# Altium PCB Game_ConsolASCII.PcbDoc
Units mil, origin at the board's own origin, x right, y up, seen from the top; angles counter-clockwise.
Board outline 3090.55 x 1732.28 mil, 2 copper layers (Top Layer, Bottom Layer); 56 components, 44 nets, 222 pads, 75 vias.
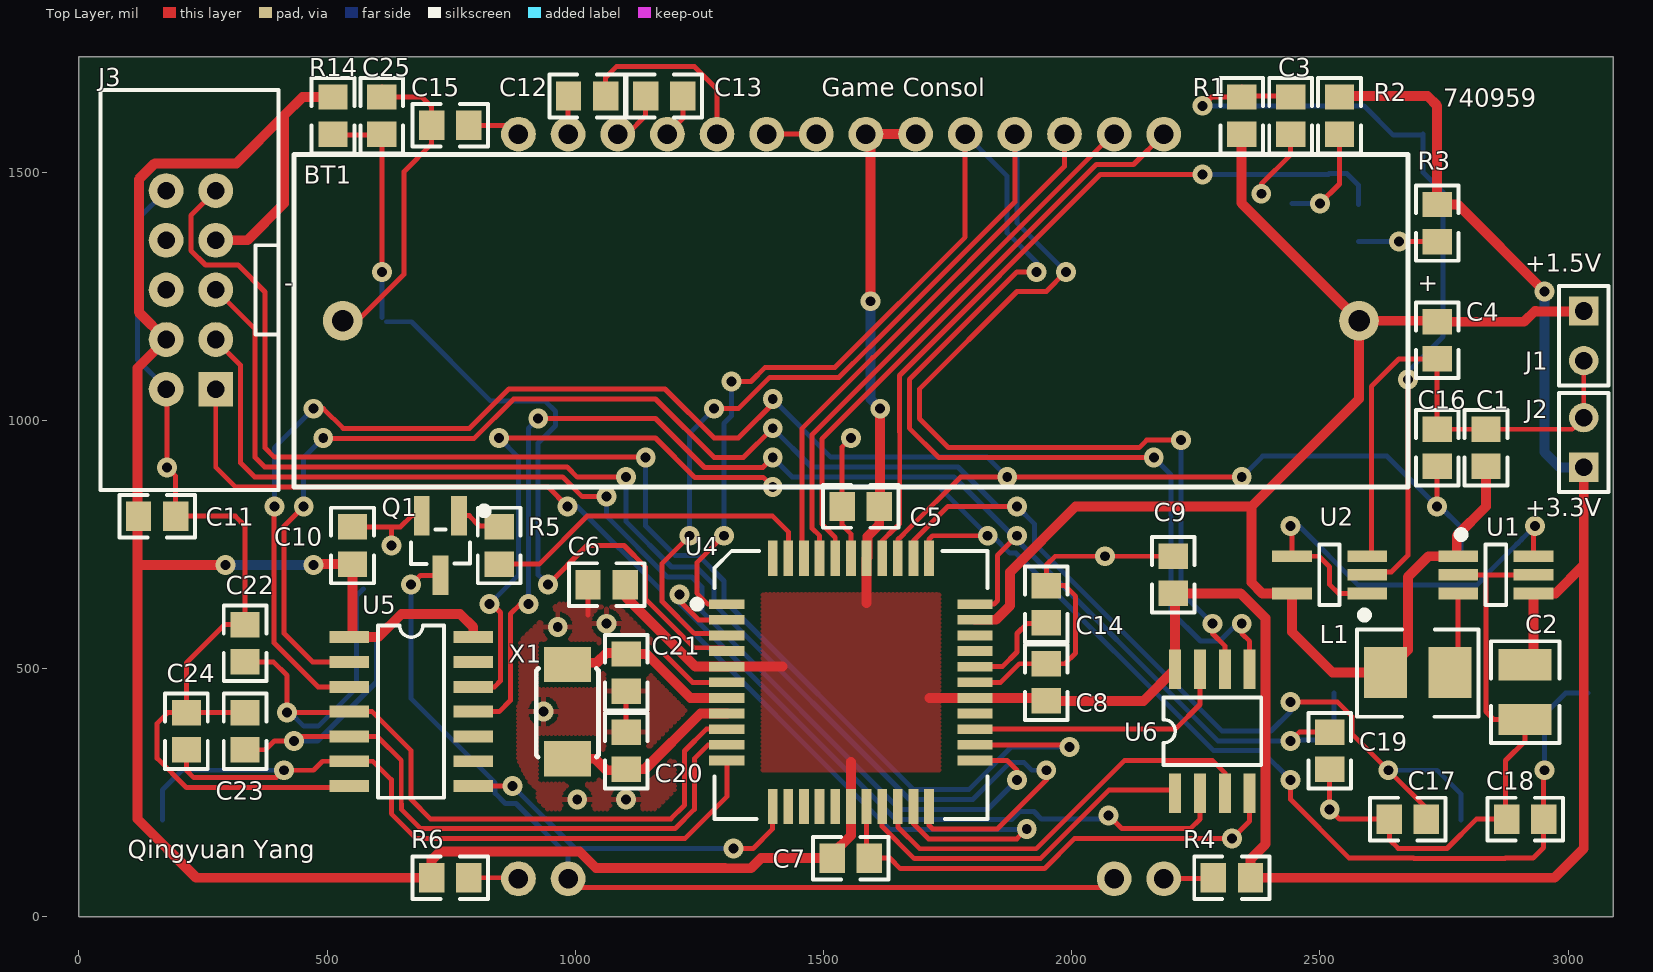
[diagram p0: Top Layer view]
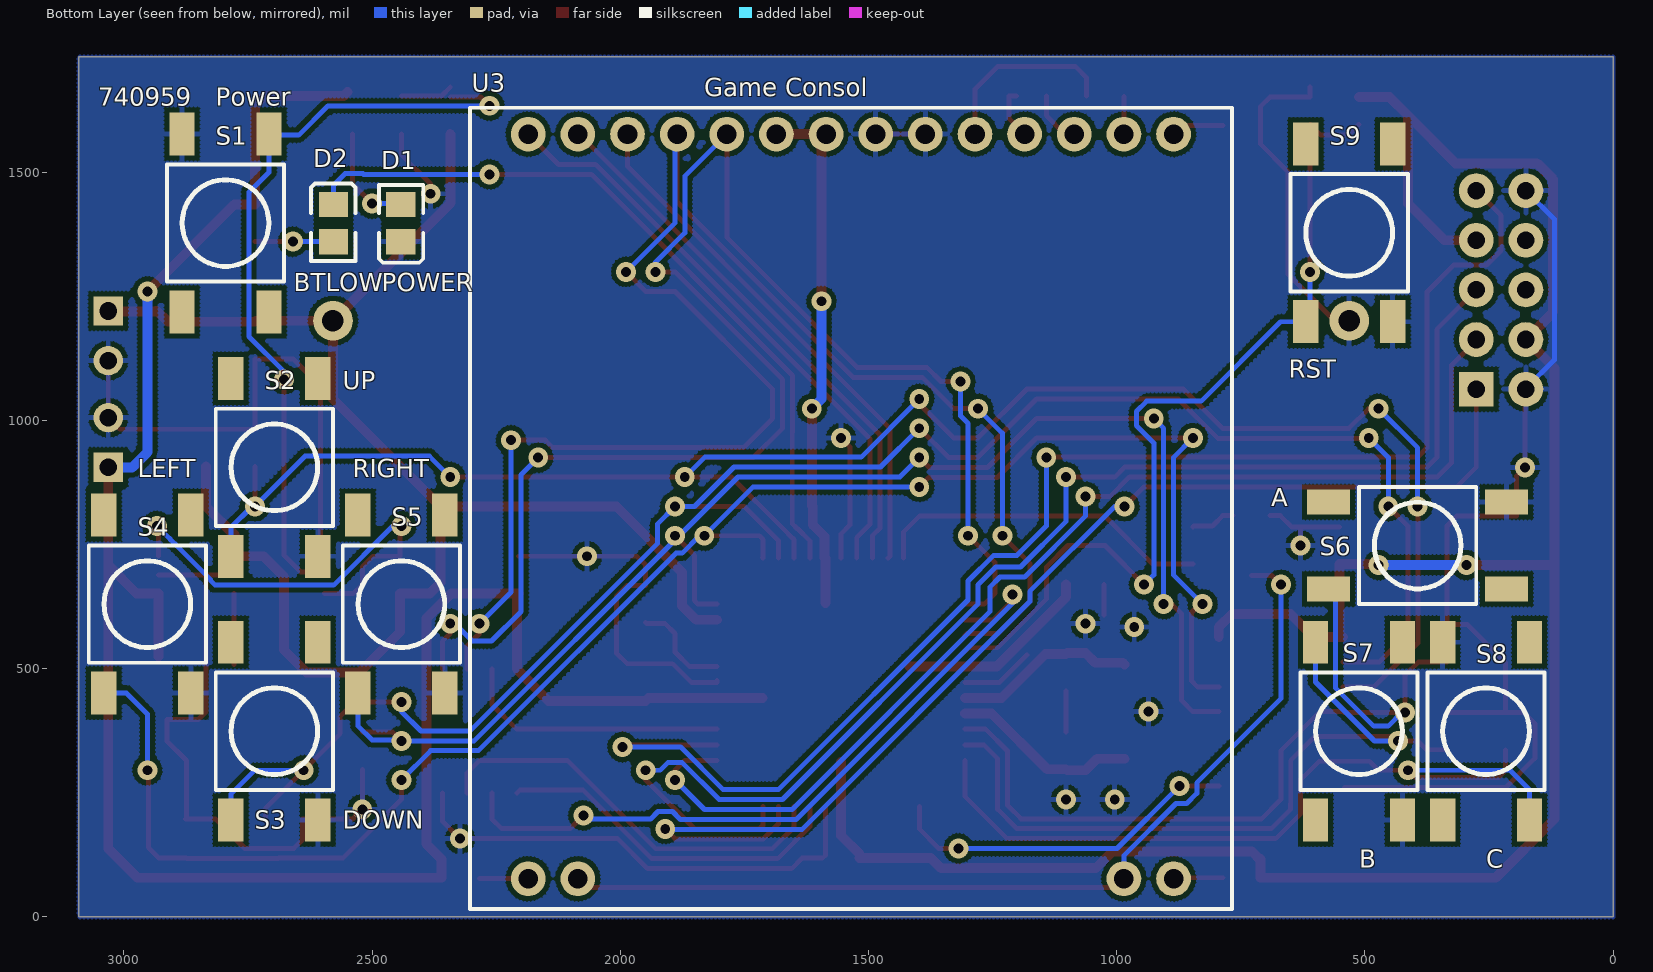
[diagram p1: Bottom Layer view, seen from below]

## Layer stack, top to bottom
Top Solder: solder mask 0.4, Solder Resist, Dk 3.5
Top Layer: signal copper 1.4
Dielectric1: dielectric 12.6, FR-4, Dk 4.8
Bottom Layer: signal copper 1.4
Bottom Solder: solder mask 0.4, Solder Resist, Dk 3.5

## Board outline
0,0 0,1732.28 3090.55,1732.28 3090.55,0

## Design rules (kind name [scope] priority, off if disabled: settings)
AssemblyTestPointUsage [All] p0: scope1count=1 scope1_0_kind=Board scope1_0_value=Board scope2count=1 scope2_0_kind=Board scope2_0_value=Board commentlength=0
AssemblyTestpoint [All] p0: scope1count=1 scope1_0_kind=Board scope1_0_value=Board scope2count=1 scope2_0_kind=Board scope2_0_value=Board commentlength=0
Clearance [All] p0: scope1count=1 scope1_0_kind=Board scope1_0_value=Board scope2count=1 scope2_0_kind=Board scope2_0_value=Board commentlength=0 gap=10
Clearance [All] p1: gap=10
ComponentClearance [All] p0 off: scope1count=1 scope1_0_kind=Board scope1_0_value=Board scope2count=1 scope2_0_kind=Board scope2_0_value=Board commentlength=0 gap=10 collisioncheckmode=3
ComponentClearance [All] p1 off: gap=10 collisioncheckmode=3 verticalgap=10 showdistances=FALSE
DiffPairsRouting [All] p0: scope1count=1 scope1_0_kind=Board scope1_0_value=Board scope2count=1 scope2_0_kind=Board scope2_0_value=Board commentlength=0
DiffPairsRouting [All] p1: maxlimit=20 minlimit=10 mostfreqgap=10 toplayer_minwidth=15 toplayer_maxwidth=15 toplayer_prefwidth=15 bottomlayer_minwidth=15 bottomlayer_maxwidth=15 bottomlayer_prefwidth=15 maxuncoupledlength=500
FabricationTestPointUsage TestPointUsage [All] p0: scope1count=1 scope1_0_kind=Board scope1_0_value=Board scope2count=1 scope2_0_kind=Board scope2_0_value=Board commentlength=0 valid=0 allowmultiple=FALSE
FabricationTestPointUsage TestPointUsage [All] p1: valid=0 allowmultiple=FALSE
FabricationTestpoint Testpoint [All] p0: scope1count=1 scope1_0_kind=Board scope1_0_value=Board scope2count=1 scope2_0_kind=Board scope2_0_value=Board commentlength=0 side=3 testpointundercomponent=TRUE minsize=40 maxsize=100 preferedsize=60 minholesize=0 maxholesize=40 preferedholesize=32 testpointgrid=1
FabricationTestpoint Testpoint [All] p1: side=3 testpointundercomponent=TRUE minsize=40 maxsize=100 preferedsize=60 minholesize=0 maxholesize=40 preferedholesize=32 testpointgrid=1 allowsidetop=TRUE allowsidebottom=TRUE usegrid=TRUE gridtolerance=0.01
FanoutControl Fanout_Default [All] p0: scope1count=1 scope1_0_kind=Board scope1_0_value=Board scope2count=1 scope2_0_kind=Board scope2_0_value=Board commentlength=30 // Fanout_Default (Default Rule)
FanoutControl Fanout_Small [All] p0 off: scope1count=1 scope1_0_kind=Board scope1_0_value=Board scope2count=1 scope2_0_kind=Board scope2_0_value=Board commentlength=84 // Protel DXP Scope 1 Expression Was: (CompPinCount < 5)   Fanout_Small (Default Rule)
FanoutControl Fanout_SOIC [All] p0 off: scope1count=1 scope1_0_kind=Board scope1_0_value=Board scope2count=1 scope2_0_kind=Board scope2_0_value=Board commentlength=71 // Protel DXP Scope 1 Expression Was: IsSOIC   Fanout_SOIC (Default Rule)
FanoutControl Fanout_LCC [All] p0 off: scope1count=1 scope1_0_kind=Board scope1_0_value=Board scope2count=1 scope2_0_kind=Board scope2_0_value=Board commentlength=69 // Protel DXP Scope 1 Expression Was: IsLCC   Fanout_LCC (Default Rule)
FanoutControl Fanout_BGA [All] p0 off: scope1count=1 scope1_0_kind=Board scope1_0_value=Board scope2count=1 scope2_0_kind=Board scope2_0_value=Board commentlength=69 // Protel DXP Scope 1 Expression Was: IsBGA   Fanout_BGA (Default Rule)
Height [All] p0: scope1count=1 scope1_0_kind=Board scope1_0_value=Board scope2count=1 scope2_0_kind=Board scope2_0_value=Board commentlength=0
Height [All] p1: minheight=0 maxheight=7874.02 prefheight=500
HoleSize [All] p0: scope1count=1 scope1_0_kind=Board scope1_0_value=Board scope2count=1 scope2_0_kind=Board scope2_0_value=Board commentlength=0 absolutevalues=TRUE maxlimit=199 minlimit=15 maxpercent=80.000 minpercent=20.000
HoleSize [All] p1: absolutevalues=TRUE maxlimit=199 minlimit=15 maxpercent=80.000 minpercent=20.000
HoleToHoleClearance [All] p0: scope1count=1 scope1_0_kind=Board scope1_0_value=Board scope2count=1 scope2_0_kind=Board scope2_0_value=Board commentlength=0
LayerPairs [All] p0: scope1count=1 scope1_0_kind=Board scope1_0_value=Board scope2count=1 scope2_0_kind=Board scope2_0_value=Board commentlength=0 enforce=TRUE
MinimumAnnularRing [All] p0: scope1count=1 scope1_0_kind=Board scope1_0_value=Board scope2count=1 scope2_0_kind=Board scope2_0_value=Board commentlength=0 minimumring=5
MinimumAnnularRing [All] p1: minimumring=5
MinimumSolderMaskSliver [All] p0: scope1count=1 scope1_0_kind=Board scope1_0_value=Board scope2count=1 scope2_0_kind=Board scope2_0_value=Board commentlength=0
NetAntennae [All] p0: scope1count=1 scope1_0_kind=Board scope1_0_value=Board scope2count=1 scope2_0_kind=Board scope2_0_value=Board commentlength=0
PasteMaskExpansion [All] p0: scope1count=1 scope1_0_kind=Board scope1_0_value=Board scope2count=1 scope2_0_kind=Board scope2_0_value=Board commentlength=0 expansion=0
PlaneClearance [All] p0: scope1count=1 scope1_0_kind=Board scope1_0_value=Board scope2count=1 scope2_0_kind=Board scope2_0_value=Board commentlength=0 clearance=20
PlaneConnect [All] p0: scope1count=1 scope1_0_kind=Board scope1_0_value=Board scope2count=1 scope2_0_kind=Board scope2_0_value=Board commentlength=0 planeconnectstyle=Relief reliefexpansion=20 reliefentries=4 reliefconductorwidth=10 reliefairgap=10
PolygonConnect [All] p0: scope1count=1 scope1_0_kind=Board scope1_0_value=Board scope2count=1 scope2_0_kind=Board scope2_0_value=Board commentlength=0 connectstyle=Relief reliefconductorwidth=10 reliefentries=4 polygonreliefangle="90 Angle"
PolygonConnect [All] p1: connectstyle=Relief reliefconductorwidth=10 reliefentries=4 polygonreliefangle="90 Angle" airgapwidth=10
RoutingCorners [All] p0: scope1count=1 scope1_0_kind=Board scope1_0_value=Board scope2count=1 scope2_0_kind=Board scope2_0_value=Board commentlength=0 cornerstyle=45-Degree minsetback=100 maxsetback=100
RoutingLayers [All] p0: scope1count=1 scope1_0_kind=Board scope1_0_value=Board scope2count=1 scope2_0_kind=Board scope2_0_value=Board commentlength=0 top layer=Automatic bottom layer=Automatic
RoutingPriority [All] p0: scope1count=1 scope1_0_kind=Board scope1_0_value=Board scope2count=1 scope2_0_kind=Board scope2_0_value=Board commentlength=0
RoutingTopology [All] p0: scope1count=1 scope1_0_kind=Board scope1_0_value=Board scope2count=1 scope2_0_kind=Board scope2_0_value=Board commentlength=0 topology=Shortest
RoutingVias [All] p0: scope1count=1 scope1_0_kind=Board scope1_0_value=Board scope2count=1 scope2_0_kind=Board scope2_0_value=Board commentlength=0 holewidth=20 width=40 viastyle="Through Hole" minholewidth=15 minwidth=25 maxholewidth=80 maxwidth=100
RoutingVias [All] p1: holewidth=20 width=40 viastyle="Through Hole" minholewidth=15 minwidth=25 maxholewidth=80 maxwidth=100
ShortCircuit [All] p0: scope1count=1 scope1_0_kind=Board scope1_0_value=Board scope2count=1 scope2_0_kind=Board scope2_0_value=Board commentlength=0 allowed=FALSE
SilkToBoardRegionClearance [All] p0: scope1count=1 scope1_0_kind=Board scope1_0_value=Board scope2count=1 scope2_0_kind=Board scope2_0_value=Board commentlength=0
SilkToSilkClearance [All] p0: scope1count=1 scope1_0_kind=Board scope1_0_value=Board scope2count=1 scope2_0_kind=Board scope2_0_value=Board commentlength=0
SilkToSolderMaskClearance SilkscreenOverComponentPads [All] p0 off: scope1count=1 scope1_0_kind=Board scope1_0_value=Board scope2count=1 scope2_0_kind=Board scope2_0_value=Board commentlength=44 // Protel DXP Scope 1 Expression Was: IsPad
SilkToSolderMaskClearance SilkscreenOverComponentPads [IsPad] p1: minsilkscreentomaskgap=10 clearancetoexposedcopper=TRUE
SolderMaskExpansion [All] p0: scope1count=1 scope1_0_kind=Board scope1_0_value=Board scope2count=1 scope2_0_kind=Board scope2_0_value=Board commentlength=0 expansion=6
SolderMaskExpansion [All] p1: expansion=6
UnRoutedNet [All] p0: scope1count=1 scope1_0_kind=Board scope1_0_value=Board scope2count=1 scope2_0_kind=Board scope2_0_value=Board commentlength=0
UnpouredPolygon [All] p0: scope1count=1 scope1_0_kind=Board scope1_0_value=Board scope2count=1 scope2_0_kind=Board scope2_0_value=Board commentlength=0
Width [All] p0: scope1count=1 scope1_0_kind=Board scope1_0_value=Board scope2count=1 scope2_0_kind=Board scope2_0_value=Board commentlength=0 maxlimit=1000 minlimit=6 preferedwidth=10
Width [All] p1: maxlimit=1000 minlimit=6 preferedwidth=10 minimp=50.000000 maximp=50.000000 favimp=50.000000
23 further rules are at their usual default settings.

## Classes and differential pairs
component class Game_Consol_Top: C12 C13 C14 C15 C16 C17 C18 C19 C20 C21 C22 C23 C24 C25 D2 J3 Q1 R3 R4 R5 R6 R14 S2 S3 S4 S5 S6 S7 S8 S9 U3 U4 U5 U6 X1
component class Game_Consol_Power: BT1 C1 C2 C3 C4 C5 C6 C7 C8 C9 C10 C11 D1 J1 J2 L1 R1 R2 S1 U1 U2

## Components (designator, comment, footprint, x,y, rotation, side; value= is the part's Value field where it differs from the comment)
BT1 "1.5v" BATT_HOLDER 1555.12,1200.79 r0 top
C1 "1uF" 0805 2834.65,944.88 r90 top
C2 "22uF" 1210 2913.39,452.76 r270 top
C3 "100nF" 0805 2440.94,1614.17 r270 top
C4 "100nF" 0805 2736.22,1161.42 r270 top
C5 "100nF" 0805 1574.8,826.77 r180 top
C6 "100nF" 0805 1062.99,669.29 r180 top
C7 "100nF" 0805 1555.12,118.11 r0 top
C8 "100nF" 0805 1948.82,472.44 r90 top
C9 "100nF" 0805 2204.72,688.98 r90 top
C10 "100nF" 0805 551.18,748.03 r90 top
C11 "100nF" 0805 157.48,807.09 r0 top
C12 "1uF" 0805 1023.62,1653.54 r0 top
C13 "1uF" 0805 1179.13,1653.54 r0 top
C14 "100nF" 0805 1948.82,629.92 r270 top
C15 "1uF" 0805 748.03,1594.49 r180 top
C16 "100nF" 0805 2736.22,944.88 r90 top
C17 "100nF" 0805 2677.17,196.85 r180 top
C18 "100nF" 0805 2913.39,196.85 r180 top
C19 "100nF" 0805 2519.68,334.65 r270 top
C20 "18pF" 0805 1102.36,334.65 r90 top
C21 "18pF" 0805 1102.36,492.13 r270 top
C22 "100nF" 0805 334.65,551.18 r90 top
C23 "100nF" 0805 334.65,374.02 r90 top
C24 "100nF" 0805 216.54,374.02 r90 top
C25 "100nF" 0805 610.24,1614.17 r90 top
D1 "POWER" 0805D 2441.94,1397.64 r90 bottom
D2 "BTLOW" 0805D 2577.74,1397.64 r270 bottom
J1 "+1.5V" HDR1X2 3031.5,1220.47 r270 top
J2 "+3.3V" HDR1X2 3031.5,905.51 r90 top
J3 "JTAG" BOXEDVERT10 275.59,1062.99 r90 top
L1 "4.7uH" 1210L 2696.85,492.13 r180 top
Q1 "RTR025N03TL" SOT23 728.35,748.03 r270 top
R1 "10k" 0805 2342.52,1614.17 r90 top
R2 "220" 0805 2539.37,1614.17 r270 top
R3 "220" 0805 2736.22,1397.64 r90 top
R4 "1k" 0805 2322.83,78.74 r180 top
R5 "15" 0805 846.46,748.03 r90 top
R6 "1k" 0805 748.03,78.74 r0 top
R14 "10k" 0805 511.81,1614.17 r270 top
S1 "Power" SPNO_SMD 2795.28,1397.64 r270 bottom
S2 "UP" SPNO_SMD 2696.85,905.51 r90 bottom
S3 "DOWN" SPNO_SMD 2696.85,374.02 r90 bottom
S4 "LEFT" SPNO_SMD 2952.76,629.92 r90 bottom
S5 "RIGHT" SPNO_SMD 2440.94,629.92 r90 bottom
S6 "A" SPNO_SMD 393.7,748.03 r0 bottom
S7 "B" SPNO_SMD 511.81,374.02 r90 bottom
S8 "C" SPNO_SMD 255.91,374.02 r270 bottom
S9 "RST" SPNO_SMD 531.5,1377.95 r90 bottom
U1 "SC120" SOT23-6 2854.33,688.98 r0 top
U2 "74AUG1G80" SOT23-5 2519.68,688.98 r180 top
U3 "EA DOGS102x-6_LCD" "EA DOGS102x" 1535.43,826.77 r180 bottom
U4 "ATMEGA16" QFP-48 1555.12,472.44 r0 top
U5 "74AHC30_NAND" SOIC-14 669.29,413.39 r0 top
U6 "FM25L04B_RAM" SOIC-8 2283.46,374.02 r90 top
X1 "7.68Mhz" XTAL_FLAT_SMD 984.25,413.39 r90 top

## Footprints (in the part's own frame and the unit in brackets; to place one, negate y for a bottom-side part, rotate by r counter-clockwise, add the part's x,y. Pads: shape width x height; smd on the part's side, far side on the other; paste and mask are expansions set on the pad)
0805 [mm] "0805 Footprint"
  rect 1.3x1.5 smd: 1(-0.95,0) 2(0.95,0)
  silkscreen extent -1.93,-1.09 1.93,1.09
0805D [mm] "0805 Diode"
  rect 1.3x1.5 smd: A(0.95,0) K(-0.95,0)
  silkscreen extent -2.03,-1.14 1.95,1.12
1210 [mm]
  rect 1.6x2.7 smd: 1(-1.4,0) 2(1.4,0)
  silkscreen extent -2.6,-1.75 2.6,1.75
1210L [mm] "Precision Wire Wound Inductor, 2-Leads, Body 3.2x3.2mm, IPC Low Density"
  rect 2.2x2.6 smd: 1(-1.651,0) 2(1.651,0)
  silkscreen extent -3.12,-2.21 3.1,2.26
BATT_HOLDER [mil]
  round 80 hole 43.31: 1(1023.62,0) 2(-1023.62,0)
  silkscreen extent -1122,-335 1122,335
BOXEDVERT10 [mil] "IDC Header 2.54mm Boxed 10 pins"
  rect 70x70 hole 35.43: 1(0,0)
  round 70 hole 35.43: 2(0,100) 3(100,0) 4(100,100) 5(200,0) 6(200,100) 7(300,0) 8(300,100) 9(400,0) 10(400,100)
  silkscreen extent -203,-127 603,232
"EA DOGS102x" [mil] "graphics display footprint"
  round 70 hole 39.37: 1(-650,-750) 2(-550,-750) 13(550,-750) 14(650,-750) 15(650,750) 16(550,750) 17(450,750) 18(350,750) 19(250,750) 20(150,750) 21(50,750) 22(-50,750) 23(-150,750) 24(-250,750) 25(-350,750) 26(-450,750) 27(-550,750) 28(-650,750)
  silkscreen extent -768,-811 768,803
HDR1X2 [mm] "Connector; Header; 2 Position"
  rect 1.5x1.5 hole 0.9: 1(0,0)
  round 1.5 hole 0.9: 2(2.54,0)
  silkscreen extent -1.27,-1.27 3.81,1.27
QFP-48 [mm]
  rect 1.8x0.5 smd: 1(-6.35,4) 2(-6.35,3.2) 3(-6.35,2.4) 4(-6.35,1.6) 5(-6.35,0.8) 6(-6.35,0) 7(-6.35,-0.8) 8(-6.35,-1.6) 9(-6.35,-2.4) 10(-6.35,-3.2) 11(-6.35,-4) 23(6.35,-4) 24(6.35,-3.2) 25(6.35,-2.4) 26(6.35,-1.6) 27(6.35,-0.8) 28(6.35,0) 29(6.35,0.8) 30(6.35,1.6) 31(6.35,2.4) 32(6.35,3.2) 33(6.35,4)
  rect 0.5x1.8 smd: 12(-4,-6.35) 13(-3.2,-6.35) 14(-2.4,-6.35) 15(-1.6,-6.35) 16(-0.8,-6.35) 17(0,-6.35) 18(0.8,-6.35) 19(1.6,-6.35) 20(2.4,-6.35) 21(3.2,-6.35) 22(4,-6.35) 34(4,6.35) 35(3.2,6.35) 36(2.4,6.35) 37(1.6,6.35) 38(0.8,6.35) 39(0,6.35) 40(-0.8,6.35) 41(-1.6,6.35) 42(-2.4,6.35) 43(-3.2,6.35) 44(-4,6.35)
  silkscreen extent -8,-6.98 6.98,6.73
SOIC-8 [mil] "SOIC-8 Footprint"
  rect 80x24 smd: 1(-125,75) 2(-125,25) 3(-125,-25) 4(-125,-75) 5(125,-75) 6(125,-25) 7(125,25) 8(125,75)
  silkscreen extent -68,-98 68,98
SOIC-14 [mil] "SOIC-14 Footprint"
  rect 80x24 smd: 1(-125,150) 2(-125,100) 3(-125,50) 4(-125,0) 5(-125,-50) 6(-125,-100) 7(-125,-150)
  rect 80x24.02 smd: 8(125,-150) 9(125,-100) 10(125,-50) 11(125,0) 12(125,50) 13(125,100) 14(125,150)
  silkscreen extent -67,-173 66,173
SOT23 [mil] "SOT23, 3-Leads, Body 3.0x2.5mm (max), Pitch 0.95mm, IPC Low Density"
  rect 80.24x31.5 smd: 1(-60,37.4)
  rect 80x31.5 smd: 2(-60,-37.4) 3(60,0)
  silkscreen extent -75,-59 37,93
SOT23-5 [mm]
  rect 2.032x0.6 smd: 1(-1.929,0.95) 2(-1.929,0) 3(-1.929,-0.95) 4(1.929,-0.95) 5(1.929,0.95)
  silkscreen extent -1.9,-1.55 0.53,2.18
SOT23-6 [mm]
  rect 2.032x0.6 smd: 1(-1.929,0.95) 2(-1.929,0) 3(-1.929,-0.95) 4(1.929,-0.95) 5(1.929,0) 6(1.929,0.95)
  silkscreen extent -1.9,-1.55 0.53,2.18
SPNO_SMD [mm] "SP NO SMD Tactile switch"
  rect 2.2x1.3 smd: 1(-4.55,-2.225) 2(4.55,-2.225) 3(-4.55,2.225) 4(4.55,2.225)
  silkscreen extent -3,-3 3,3
XTAL_FLAT_SMD [mm]
  rect 1.8x2.4 smd: 1(-2.412,0) 2(2.413,0)
  silkscreen extent -2.33,-1.59 2.21,1.6

## Part data
BT1: library part BAT, "Battery Holder AA 1.5v"
C1 C3 C4 C5 C6 C7 C8 C9 C10 C11 C12 C13 C14 C15 C16 C17 C18 C19 C20 C21 C22 C23 C24 C25: library part "C 0805", "Capacitor 100nF"
C2: library part "C 1210", "Capacitor 22uF"
D1: library part "LED GREEN", "Light Emitting Diode"
D2: library part "LED RED", "Light Emitting Diode"
J1 J2: library part "Header 2", "Header, 2-Pin"
J3: library part JTAG_CON, "JTAG ATMEL connector"
L1: library part "I 1210", "Inductor 4.7uH"
Q1: library part MOSFET-N, "N-Channel MOSFET"
R1 R2 R3 R4 R5 R6 R14: library part R, "Resistor"
S1 S2 S3 S4 S5 S6 S7 S8 S9: library part SW-PB, "Push Button Switch"
U1: "Regulator Low Voltage"
U2: "Inverted single D flip flop"
U3: library part "EA DOGS102x-6", "LCD 102x64-pixel with backlight"
U4: "ATMEGA16 Microcontroller"
U5: library part 74AHC30, "1 x 8 Input NAND gate"
U6: library part FM25L04B, "FRAM 4Kb Memory"
X1: library part XTAL, "Crystal Oscillator"

## Via types
v1: diameter 40, hole 20, Top Layer to Bottom Layer, tented both sides, 75 vias

## Nets (pads, with @x,y where several pads share a name; then routed paths per layer and width w, separated by ;. In a path a pad name is that pad's centre, name@x,y a point inside that pad or via, vN(x,y) a via of type N, cw(c..) or ccw(c..) an arc to the next point about the centre after c; other vN are vias at no path point)
BUTTON_INT: U4.12 U5.8 | length 717
  Top Layer w10: U5.8 v1(873.62,263.39) ; v1(1318.9,137.8) 1358.27,137.8 1397.64,177.17 U4.12
  Bottom Layer w10: v1(873.62,263.39) 999.21,137.8 v1(1318.9,137.8)
CD: U3.26 U4.42 | length 1075.4
  Top Layer w10: U4.42 1456.81,726.26 1456.81,984.13 1599.09,1126.42 1599.93,1126.42 1985.43,1511.92 U3.26
CS: U4.19 U6.1 | length 718
  Top Layer w10: U4.19 1618.11,181.87 1682.82,117.17 1936.79,117.17 2075.53,255.91 2201.57,255.91 U6.1
CS0: U3.28 U4.40 | length 1194.4
  Top Layer w10: U4.40 1523.62,764.22 1496.81,791.03 1496.81,962.83 2049.73,1515.75 2124.41,1515.75 U3.28
DOWN: C17.1 S3.3 U4.35 U5.2 | length 3843.6
  Top Layer w10: v1(452.76,826.77) 413.39,787.4 413.39,570.87 470.87,513.39 U5.2 ; v1(492.13,964.57) 492.76,963.94 796.33,963.94 875.7,1043.31 1161.42,1043.31 1279.53,925.2 1338.58,925.2 v1(1397.64,984.25) ; U4.35 1681.1,757.43 1750.44,826.77 v1(1889.76,826.77) ; v1(2440.94,433.07) 2534.99,433.07 2564.21,403.85 2564.21,368.86 v1(2637.8,295.28) 2714.57,218.5 C17.1
  Bottom Layer w10: v1(452.76,826.77) 452.76,925.2 v1(492.13,964.57) ; v1(1397.64,984.25) 1475.75,906.14 1771.02,906.14 1850.39,826.77 v1(1889.76,826.77) 1924.76,791.77 1924.76,752.4 2302.52,374.65 2398.46,374.65 2398.77,374.33 2401.57,374.33 2440.94,413.7 v1(2440.94,433.07) ; v1(2637.8,295.28) 2736.22,295.28 2784.45,247.05 S3.3
GND: BT1.2 C1.2 C2.2 C3.2 C4.2 C5.2 C6.2 C7.2 C8.2 C9.2 C10.2 C11.2 C14.1 C15.2 C16.2 C17.2 C18.2 C19.2 C20.2 C21.2 C22.2 C23.2 C24.2 C25.2 D1.K J1.2 J2.2 J3.2 J3.10 Q1.2 S1.1 S2.1 S3.1 S4.1 S5.1 S6.1 S7.1 S8.1 S9.1 U1.2 U1.5 U2.3 U3.20 U3.21 U4.6 U4.18 U4.28 U4.39 U5.7 U6.4 | length 7589.3
  Top Layer w10: J3.2@177.17,1061.42 v1(177.17,905.51) 194.88,887.8 C11.2 314.96,807.09 334.65,787.4 C22.2 293.31,588.58 216.54,511.81 C24.2 ; C23.2 C24.2 ; BT1.2 561.31,1200.79 654.76,1294.24 654.76,1501.22 710.63,1557.09 C15.2 710.63,1631.89 690.94,1651.57 C25.2 C25.2@610.24,1671.26 ; U5.7@541.18,260.28 216.54,260.28 157.48,319.34 157.48,389.76 179.13,411.42 C24.2 ; C10.2 629.92,785.43 ; v1(629.92,748.03) 629.92,785.43 ; Q1.2 670.24,808.03 647.64,785.43 629.92,785.43 ; 1025.59,608.27 C6.2 ; C20.2 C21.2 ; 1181.1,527.48 1236.14,472.44 U4.6 ; U3.20 U3.21 ; U4.39 1555.12,771.65 1537.4,789.37 C5.2 1537.4,946.85 v1(1555.12,964.57) ; C7.2@1586.61,124.02 U4.18 ; C7.2 1633.86,118.11 1654.8,97.17 1945.07,97.17 2005.39,157.48 v1(2322.83,157.48) 2358.46,193.11 U6.4 ; U4.28@1805.12,475.63 U4.28 1857.02,472.44 1894.43,509.84 C8.2 1986.22,509.84 2007.87,531.5 2007.87,645.67 1986.22,667.32 C14.1 1948.82,708.66 1966.54,726.38 C9.2 ; v1(2381.89,1456.69) 2381.89,1476.38 2440.94,1535.43 C3.2 ; C19.2 v1(2519.68,216.54) 2539.37,196.85 C17.2 2639.76,155.83 2657.48,138.11 2696.98,138.11 ; U2.3@2603.74,726.38 2603.74,1068.31 2659.45,1124.02 C4.2 C16.2 C1.2 3008.27,982.28 J2.2 J1.2 ; 2697.29,137.8 2755.91,137.8 2814.96,196.85 C18.2 ; U1.2 2834.65,688.98 ; C18.2@2874.02,198.82 2874.02,314.96 2913.39,354.33 C2.2 2850.39,397.64 2834.65,413.39 2834.65,688.98 ; U1.5 2834.65,688.98
  Bottom Layer w10: J3.2@175.59,1064.57 118.11,1122.05 118.11,1405.51 J3.10
  other v1: 1003.94,236.22 1102.36,236.22 936,413.39 964.57,584 1062.99,590.55 2066.93,726.38
HOLD: U4.25 U6.7 | length 545.2
  Top Layer w10: U4.25 2208.66,377.95 2258.46,427.76 U6.7
KEY1: C22.1 S6.4 U4.9 U5.4 | length 1728.9
  Top Layer w10: C22.1 391.73,513.78 419.17,486.34 v1(419.17,411.54) U5.4@542.44,411.54 ; U5.4 590.55,413.39 669.29,334.65 669.29,236.22 708.03,197.48 1192.5,197.48 1219.84,224.82 1219.84,334.02 1263.78,377.95 U4.9
  Bottom Layer w10: v1(419.17,411.54) 425.36,411.54 452.9,384 482.09,384 558.82,460.72 558.82,646.42 S6.4
KEY2: C23.1 S7.4 U4.10 U5.5 | length 1526.4
  Top Layer w10: C23.1 375.98,336.61 393.7,354.33 v1(433.07,354.33) ; v1@442.13,363.39 U5.5 601.18,363.39 649.29,315.28 649.29,227.62 649.61,227.31 649.61,216.54 688.66,177.48 1200.79,177.48 1239.84,216.54 1239.84,316.17 ; 1239.84,318.58 1267.72,346.46 U4.10
  Bottom Layer w10: v1(433.07,354.33) 480.71,354.33 599.41,473.03 S7.4
KEY3: C24.1 S8.4 U4.11 U5.6 | length 1663.5
  Top Layer w10: C24.1 216.54,295.28 231.54,280.28 398.39,280.28 ; v1(413.39,295.28) 472.44,295.28 490.55,313.39 U5.6 592.13,313.39 629.29,276.22 629.29,207.94 679.75,157.48 1220.47,157.48 1305.12,242.13 U4.11
  Bottom Layer w10: S8.4 168.31,255.91 207.68,295.28 v1(413.39,295.28)
LEFT: C18.1 S4.3 U4.34 U5.12 | length 3616
  Top Layer w10: U5.12 837.4,463.39 849.29,475.28 849.29,613.07 v1@832.44,629.92 ; v1(846.46,964.57) 1161.42,964.57 1240.79,885.2 1355.15,885.2 1355.47,885.51 1378.27,885.51 v1(1397.64,866.14) ; U4.34@1713.54,723.39 U4.34 1712.6,760.65 1719.67,767.72 v1(1830.71,767.72) ; v1(2440.94,275.59) 2440.94,236.22 2559.06,118.11 2688.69,118.11 2689.01,117.8 2873.26,117.8 ; 2873.58,118.11 2929.13,118.11 2950.79,139.76 C18.1 v1@2950.79,293.31
  Bottom Layer w10: v1(826.77,629.92) 885.2,688.35 885.2,925.83 v1(846.46,964.57) ; v1(1397.64,866.14) 1732.28,866.14 v1(1830.71,767.72) 1840.27,767.72 1875.27,732.72 1887.88,732.72 2285.95,334.65 2381.89,334.65 v1(2440.94,275.59) ; v1(2952.76,295.28) 2952.76,408.63 2994.91,450.79 S4.3
MISO: U4.2 U6.2 | length 1458.2
  Top Layer w10: v1(1209.87,649.61) 1209.87,636.59 1248.03,598.42 U4.2 ; v1(2074.41,204.33) 2101.26,177.48 2239.09,177.48 2258.46,196.85 U6.2
  Bottom Layer w10: v1(1209.87,649.61) 1209.87,631.93 1645.57,196.22 1879.01,196.22 1894.95,212.17 1923.95,212.17 1939.26,196.85 2066.93,196.85 v1(2074.41,204.33)
MOSI: U3.24 U4.1 U6.5 | length 3225.8
  Top Layer w10: v1(1299.21,767.72) 1244.87,713.37 1244.87,651.97 1266.91,629.92 U4.1 ; v1(1314.53,1078.31) 1353.9,1078.31 1382.45,1106.86 1522.97,1106.86 1785.43,1369.32 U3.24 ; v1(1929.13,1299.21) 1889.76,1299.21 1672.91,1082.36 1672.91,984.57 1732.28,925.2 v1(2165.35,925.2) ; v1(2342.52,590.55) 2342.52,570.87 2358.46,554.92 U6.5
  Bottom Layer w10: v1(1299.21,767.72) 1299.21,993.81 1314.53,1009.12 v1(1314.53,1078.31) ; U3.24 1870.08,1492.13 1870.08,1377.95 1929.13,1318.9 v1(1929.13,1299.21) ; v1(2165.35,925.2) 2200.04,890.51 2200.04,614.92 2259.41,555.55 2297.96,555.55 2332.96,590.55 v1(2342.52,590.55)
NetC3_1: C3.1 R1.2 S1.3 U2.2 | length 1643
  Top Layer w10: v1(2263.78,1633.86) 2281.5,1651.57 R1.2 ; R1.2@2342.52,1671.26 2360.24,1653.54 C3.1@2440.94,1653.54 ; U2.2@2601.2,694.57 2643.9,694.57 2677.17,727.83 2676.69,728.31 2677.17,728.78 v1(2677.17,1082.68)
  Bottom Layer w10: v1(2263.78,1633.86) 2588.94,1633.86 2648,1574.8 S1.3@2705.72,1574.8 ; v1(2677.17,1082.68) 2677.17,1097.87 2748.27,1168.98 2748.27,1460.63 ; S1.3 2707.68,1499.75 2746.8,1460.63
NetC12_1: C12.1 U3.16 | length 76
  Top Layer w10: U3.16 C12.1@985.43,1652.76
NetC12_2: C12.2 U3.19 | length 380.1
  Top Layer w10: C12.2 1061.02,1690.94 1082.68,1712.6 1240.16,1712.6 1285.43,1667.32 U3.19
NetC13_1: C13.1 U3.17 | length 131.6
  Top Layer w10: U3.17@1085.43,1597.24 U3.17 1104.33,1576.77 1141.73,1614.17 C13.1
NetC13_2: C13.2 U3.18 | length 104.2
  Top Layer w10: U3.18 1216.54,1607.87 C13.2 C13.2@1202.01,1653.54
NetC14_2: C14.2 U4.29 | length 202.3
  Top Layer w10: U4.29 1860.24,503.94 1889.76,533.46 1889.76,570.87 1909.45,590.55 1946.85,590.55 C14.2
NetC15_1: C15.1 U3.15 | length 82.3
  Top Layer w10: C15.1 U3.15@867.72,1594.49
NetD1_A: D1.A R2.2 | length 212.2
  Top Layer w10: v1(2499.99,1437.01) 2539.37,1476.38 R2.2
  Bottom Layer w10: D1.A@2443.91,1437.01 v1(2499.99,1437.01)
NetD2_A: D2.A R3.1 | length 158.5
  Top Layer w10: v1(2659.45,1360.24) R3.1
  Bottom Layer w10: D2.A v1(2659.45,1360.24)
NetD2_K: D2.K U4.37 | length 1522.5
  Top Layer w10: U4.37 1618.11,757.43 1642.92,782.24 ; 1644.01,782.24 1653.54,791.78 1653.54,975.65 1652.91,976.28 1652.91,1090.65 2058.01,1495.75 v1(2263.46,1495.75)
  Bottom Layer w10: v1(2263.46,1495.75) 2517.03,1495.75 ; 2518.35,1497.06 2554.57,1497.06 2577.74,1473.89 D2.K
NetL1_1: L1.1 U1.3 | length 142.9
  Top Layer w10: L1.1@2778.4,508.68 U1.3
NetQ1_1: Q1.1 R5.2 | length 90.1
  Top Layer w10: Q1.1 786.46,808.03 807.09,787.4 844.49,787.4 R5.2
NetQ1_3: Q1.3 U3.2 U3.13 | length 1923.3
  Top Layer w10: v1(669.29,669.29) 688.03,688.03 Q1.3 ; U3.13 985.43,59.06 1256,59.06 1797.15,59.06 2067.72,59.06 U3.2@2082.24,73.58
  Bottom Layer w10: v1(669.29,669.29) 669.29,439.43 838.62,270.1 838.62,248.89 859.12,228.39 880.34,228.39 985.43,123.29 U3.13
NetR4_2: R4.2 U3.1 | length 98
  Top Layer w10: U3.1 R4.2@2283.46,76.77
NetR6_2: R6.2 U3.14 | length 98
  Top Layer w10: R6.2 U3.14@883.46,78.74
PWM: R5.1 U4.43 | length 688.8
  Top Layer w10: R5.1 927.17,710.63 1023.62,807.09 1397.64,807.09 1429.13,775.59 U4.43
RESET: C25.1 R14.2 S9.3 U4.4 | length 1811
  Top Layer w10: R14.2@511.81,1596.46 533.46,1574.8 588.58,1574.8 610.24,1596.46 v1(610.24,1299.21) ; v1(944.88,669.29) 1023.62,748.03 1097.98,748.03 1140.98,705.03 ; 1141.73,705.03 1141.73,639.96 1239.6,542.09 1298.46,542.09 U4.4
  Bottom Layer w10: S9.3@610.24,1207.68 v1(610.24,1299.21) ; S9.3 670.03,1198.82 829.91,1038.94 939.69,1038.94 960.2,1018.43 960.2,989.44 925.2,954.44 925.2,688.98 v1(944.88,669.29)
RIGHT: C19.1 S5.3 U4.33 U5.11 | length 2940.2
  Top Layer w10: U5.11 846.46,413.39 869.29,436.22 869.29,610.24 888.98,629.92 v1(905.51,629.92) ; v1(925.2,1003.94) 1161.42,1003.94 1260.16,905.2 1346.87,905.2 1347.18,905.51 1377.95,905.51 v1(1397.64,925.2) ; U4.33 1843.32,629.92 1850.39,636.99 1850.39,728.35 v1(1889.76,767.72) ; v1(2440.94,354.33) 2458.66,372.05 C19.1
  Bottom Layer w10: v1(905.51,629.92) 905.83,630.24 905.83,680.06 905.2,680.69 905.2,983.94 v1(925.2,1003.94) ; v1(1397.64,925.2) 1436.69,886.14 1762.74,886.14 v1@1889.76,759.12 ; v1(1889.76,767.72) v1@1889.76,759.12 ; v1(2440.94,354.33) 2390.49,354.33 2390.17,354.65 2294.24,354.65 v1@1889.76,759.12 ; v1@2442.91,356.3 2500,356.3 2528.54,384.84 S5.3
RST: U3.27 U4.41 | length 1114.5
  Top Layer w10: U4.41 1492.13,767.43 1476.81,782.75 1476.81,971.11 2082.47,1576.77 U3.27
SCK: U3.25 U4.3 U6.6 | length 3346.4
  Top Layer w10: v1@1240.16,767.72 v1(1230.32,767.72) 1174.87,712.27 1174.87,635.11 1239.42,570.55 1301.5,570.55 U4.3 ; v1(1279.53,1023.62) 1328.46,1023.62 1391.69,1086.86 1531.25,1086.86 1590.81,1146.42 1591.65,1146.42 1885.43,1440.2 U3.25 ; v1@1978.63,1299.21 v1(1988.19,1299.21) 1948.82,1259.84 1889.76,1259.84 1692.91,1062.99 1692.91,1003.94 1751.65,945.2 2135.86,945.2 2150.86,960.2 v1(2220.04,960.2) ; v1(2283.46,590.55) 2283.46,570.87 2308.46,545.87 U6.6
  Bottom Layer w10: v1(1230.32,767.72) 1230.32,974.41 v1(1279.53,1023.62) ; U3.25@1889.76,1572.44 1890.08,1572.13 1890.08,1397.32 v1(1988.19,1299.21) ; v1(2220.04,960.2) 2220.04,653.98 v1(2283.46,590.55)
SOFT_POWER: U1.6 U2.1 U2.4 | length 916.8
  Top Layer w10: v1(2440.94,787.4) 2443.76,784.59 U2.4 2498.03,726.38 2519.68,704.72 2519.68,669.29 2537.4,651.57 U2.1 ; U1.6 v1@2930.26,784.59
  Bottom Layer w10: v1(2440.94,787.4) 2458.12,787.4 2577.45,668.07 2816.25,668.07 2825.04,676.86 2825.04,679.37 2896.42,750.75 2896.96,750.75 2905.75,759.53 2905.75,760.08 2913.39,767.72 v1(2933.07,787.4)
TCK: J3.1 U4.21 | length 2390.1
  Top Layer w10: J3.1 275.59,905.51 314.96,866.14 944.88,866.14 v1(984.25,826.77) ; U4.21 1681.1,187.45 1711.38,157.17 1889.45,157.17 v1(1909.45,177.17)
  Bottom Layer w10: v1(984.25,826.77) 1003.94,826.77 1174.87,655.84 1174.87,635.11 1633.75,176.22 1908.5,176.22 v1(1909.45,177.17)
TDI: J3.9 U4.24 | length 2870.3
  Top Layer w10: J3.9 225.59,1412.99 225.59,1342.28 254.88,1312.99 320.87,1312.99 374.96,1258.9 374.96,944.88 393.7,926.14 1140.79,926.14 v1(1141.73,925.2) ; U4.24 v1@1991.34,346.46
  Bottom Layer w10: v1(1141.73,925.2) 1141.73,787.4 1200.79,728.35 1247.8,728.35 1299.53,676.62 1299.53,638.21 1681.51,256.22 1792.61,256.22 1878.52,342.13 v1(1995.67,342.13)
TDO: J3.3 U4.23 | length 2310.1
  Top Layer w10: J3.3@275.59,1161.42 325.59,1111.42 325.59,914.57 354.02,886.14 974.38,886.14 1014.07,846.45 v1(1062.99,846.45) ; U4.23 1870.08,314.96 1889.76,295.28 v1(1889.76,275.59)
  Bottom Layer w10: v1(1062.99,846.45) 1062.99,807.09 1185.47,684.61 1234.97,684.61 1255.47,664.1 1255.47,614.61 1653.86,216.22 1830.39,216.22 v1(1889.76,275.59)
TMS: J3.5 U4.22 | length 2700
  Top Layer w10: J3.5 354.96,1183.62 354.96,925.2 374.02,906.14 983.62,906.14 1003.94,885.83 v1(1102.36,885.83) ; U4.22 1712.6,184.24 1719.67,177.17 1850.39,177.17 1948.82,275.59 v1(1948.82,295.28)
  Bottom Layer w10: v1(1102.36,885.83) 1102.36,796 1193.76,704.61 1243.25,704.61 1279.53,668.33 1279.53,629.92 1673.23,236.22 1800.9,236.22 1875.27,310.59 1904.26,310.59 1919.58,295.28 v1(1948.82,295.28)
UP: C16.1 S2.3 U4.36 U5.3 | length 3747.6
  Top Layer w10: v1(393.7,826.77) 393.39,826.46 393.39,551.5 481.5,463.39 U5.3 ; v1(472.44,1023.62) 492.44,1023.62 532.13,983.94 786.77,983.94 866.14,1063.31 1180.79,1063.31 1279.53,964.57 1328.46,964.57 1407.2,1043.31 v1(1397.64,1043.31) ; U4.36 1649.61,760.65 1651.2,762.24 1652.29,762.24 1673.54,783.49 1775.88,885.83 1781.21,885.83 1781.53,886.14 1794.14,886.14 1794.46,886.46 1906.33,886.46 1906.65,886.14 1937.42,886.14 1937.73,885.83 v1(2342.52,885.83) ; v1(2736.22,826.77) C16.1
  Bottom Layer w10: v1(393.7,826.77) 393.7,944.88 v1(472.44,1023.62) ; v1@1397.64,1033.75 v1(1397.64,1043.31) 1514.8,926.14 1829.76,926.14 v1(1870.08,885.83) ; v1(2342.52,885.83) 2384.69,928 2634.99,928 v1(2736.22,826.77) 2741.91,826.77 2784.45,784.24 S2.3
VBATT: BT1.1 C1.1 C4.1 J1.1 L1.2 R1.1 U1.1 U2.5 U4.32 | length 3163.9
  Top Layer w20: U4.32 1847.18,598.42 ; 1848.84,600.08 1875.39,626.64 1875.39,694.29 2007.87,826.77 2362.2,826.77 ; R1.1 2341.89,1576.14 2341.89,1437.64 BT1.1 ; C4.1@2734.25,1200.79 BT1.1 ; C4.1 2911.42,1198.82 2933.07,1220.47 2935.55,1220.47 2936.18,1219.84 3030.86,1219.84 J1.1 ; U1.1@2775.59,729.19 2775.59,767.72 2834.65,826.77 C1.1 ; U1.1 2718.5,726.38 2677.17,685.04 2677.17,537.44 L1.2 2525.31,492.13 2443.76,573.68 U2.5 2383.86,651.57 2362.2,673.23 2362.2,826.77 ; 2362.2,826.77 2578.74,1043.31 BT1.1
VCC: C2.1 C5.1 C6.1 C7.1 C8.1 C9.1 C10.1 C11.1 J2.1 J3.4 J3.7 R2.1 R3.2 R4.1 R6.1 R14.1 U1.4 U3.22 U3.23 U4.5 U4.17 U4.27 U4.38 U5.1 U5.14 U6.8 | length 10435.3
  Top Layer w20: J3.7 339.37,1362.99 413.39,1437.01 413.39,1614.17 ; v1(295.28,708.66) 118.11,708.66 ; v1@474.41,710.63 C10.1 U5.1@551.18,570.28 ; R14.1 450.79,1651.57 413.39,1614.17 ; U5.1 602.76,563.39 649.61,610.24 767.72,610.24 794.29,583.66 U5.14 ; C6.1@1102.36,669.29 1102.36,643.97 1242.4,503.94 U4.5 1417.26,503.94 ; C7.1 1373.94,118.11 1353.62,97.8 1302.33,97.8 1301.7,98.43 1041.56,98.43 1008.21,131.77 727.64,131.77 712.01,116.14 710.63,116.14 R6.1 236.22,78.74 118.11,196.85 118.11,708.66 ; C7.1@1517.72,126.71 1555.12,164.11 U4.17 1555.12,312 ; 1586.61,632.54 U4.38 ; U4.38@1588.27,724.09 1588.27,766.16 1611.48,789.37 1612.2,789.37 C5.1 1614.17,828.74 v1(1614.17,1023.62) ; v1(1594.49,1240.16) 1594.49,1567.72 U3.22 U3.23 ; 1713.54,440.94 U4.27 C8.1@1942.91,440.94 ; C8.1 2144.49,435.04 U6.8 C9.1@2208.46,647.83 ; C9.1 2340.55,651.57 2390.46,601.66 2390.46,146.37 2360.24,116.14 R4.1 2972.44,78.74 3031.5,137.8 3031.5,708.66 ; R2.1@2549.21,1661.42 2557.09,1653.54 2716.54,1653.54 2736.22,1633.86 R3.2 2777.55,1435.04 v1(2952.75,1259.84) ; C2.1@2930.26,524.75 U1.4 2974.41,651.57 3031.5,708.66 ; J2.1 3031.5,708.66 ; 118.11,708.66 118.11,1105.51 J3.4 120.59,1217.99 120.59,1485.77 152.81,1517.99 317.2,1517.99 413.39,1614.17
  Bottom Layer w20: v1(295.28,708.66) v1(472.44,708.66) ; v1(1594.49,1240.16) 1594.49,1043.31 v1(1614.17,1023.62) ; 2952.75,984.26 v1(2952.75,1259.84) ; 2952.76,1003.93 2952.76,936 2983.24,905.51 J2.1
WP: U4.20 U6.3 | length 843.6
  Top Layer w10: U4.20 1649.61,181.1 1693.54,137.17 1928.5,137.17 2106.61,315.28 2283.15,315.28 2308.46,289.96 U6.3
XTAL1: C20.1 U4.8 X1.1 | length 375
  Top Layer w20: X1.1 1039.86,318.41 1062.99,295.28 C20.1@1100.39,295.28 ; C20.1 1139.76,297.24 1251.97,409.45 U4.8
XTAL2: C21.1 U4.7 X1.2 | length 368
  Top Layer w20: X1.2 987.7,511.81 1043.31,511.81 1062.99,531.5 1100.39,531.5 C21.1 1143.7,529.53 1232.28,440.94 U4.7
pads on no net: J3.6 J3.8 S1.2 S1.4 S2.2 S2.4 S3.2 S3.4 S4.2 S4.4 S5.2 S5.4 S6.2 S6.3 S7.2 S7.3 S8.2 S8.3 S9.2 S9.4 U4.13 U4.14 U4.15 U4.16 U4.26 U4.30 U4.31 U4.44 U5.9 U5.10 U5.13

## Polygon pours and split planes (outlines as drawn)
VCC on Top Layer "Top Layer-No Net" (hatched 90Degree grid 8 track 10, pour order 2): 1377.95,649.61 1732.28,649.61 1732.28,295.28 1377.95,295.28
GND on Top Layer "Top Layer-No Net" (hatched 90Degree grid 8 track 10, pour order 10): 885.83,551.18 925.2,590.55 944.88,610.24 964.57,629.92 1082.68,629.92 1141.73,590.55 1181.1,531.5 1220.47,492.13 1220.47,413.39 1220.47,354.33 1200.79,314.96 1200.79,295.28 1200.79,275.59 1200.79,255.91 1181.1,236.22 1161.42,216.54 1122.05,216.54 944.88,216.54 925.2,236.22 925.2,255.91 905.51,275.59 885.83,314.96
GND on Bottom Layer "Top Layer-No Net" (hatched 90Degree grid 8 track 10, pour order 8): 0,1732.28 3090.55,1732.28 3090.55,0 0,0

## Silkscreen, mask and mechanical layers (free items; w line width, h text height)
Top Overlay:
  text "Game Consol" at 1496.06,1653.54 h36
  text "740959" at 2748.27,1632 h36
  text "Qingyuan Yang" at 98.43,118.11 h36
Bottom Overlay:
  text "Game Consol" at 1830.71,1653.54 h36
  text "740959" at 3051.18,1633.86 h36
Mechanical 1:
  the board outline again, w10

## Text inside footprints (layer, text, board x,y; h text height)
BT1: Top Overlay "+" at 2696.85,1259.84 h36; Top Overlay "-" at 413.39,1259.84 h36
U3: Mechanical 1 "Qingyuan Yang" at 610.24,1633.86 h36